# EAGLE board receiver (EAGLE 6.4)
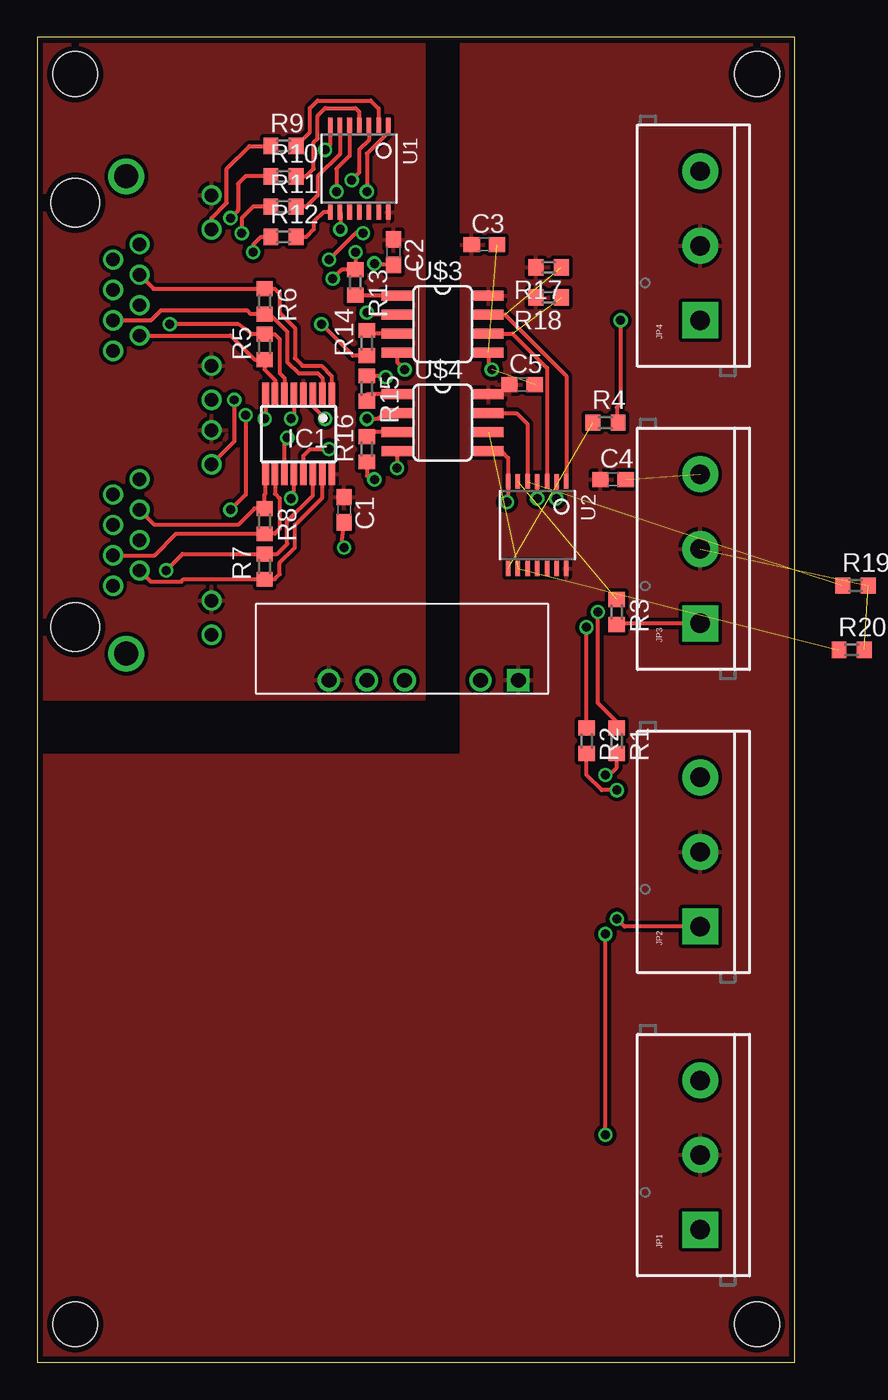
[diagram p0: board, top side]
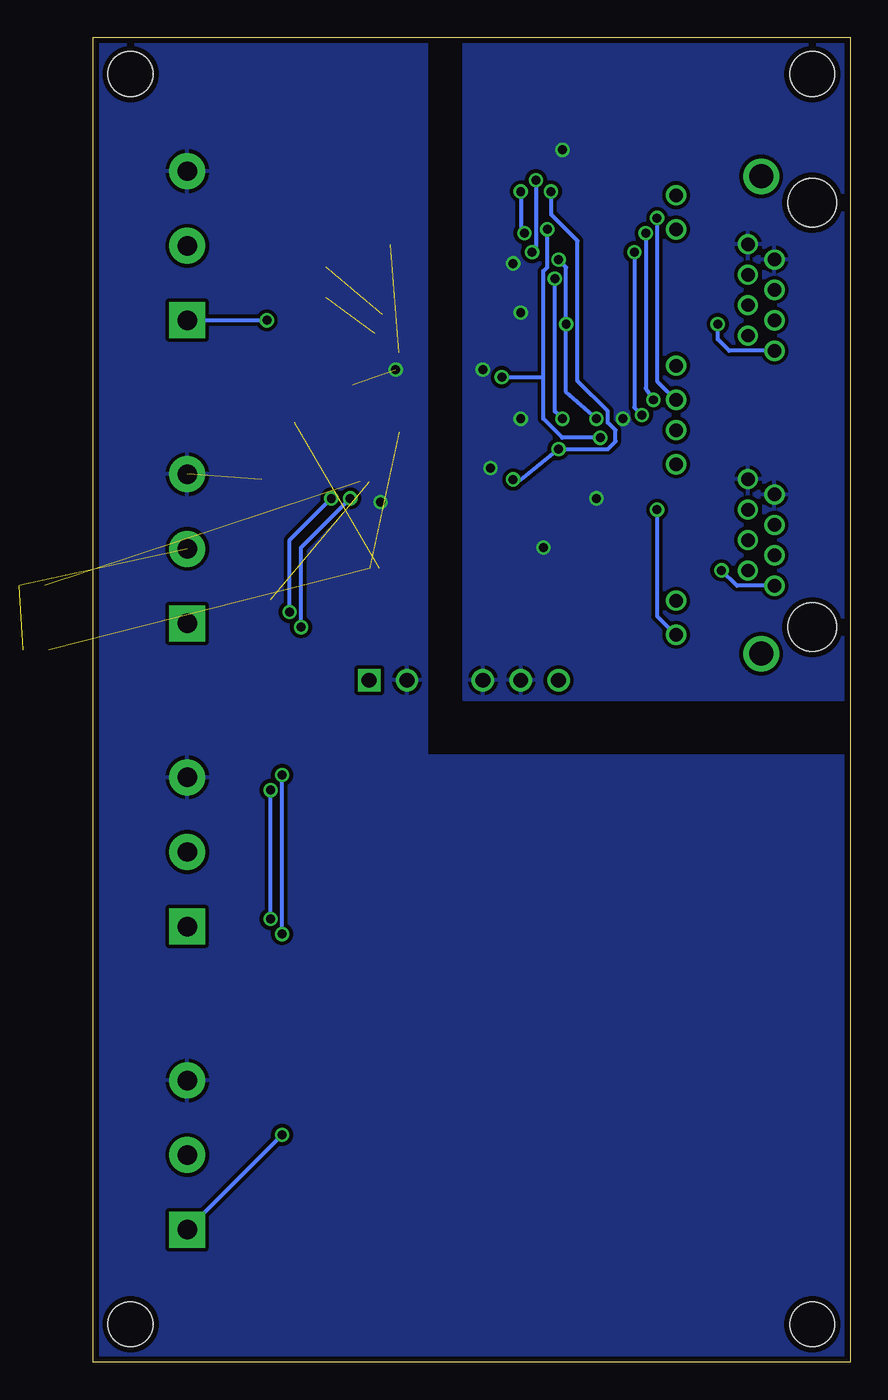
[diagram p1: board, bottom side, seen from below]

Size 50.78 x 88.82 mm. Coordinates in mm from the lower left corner, seen from the top.
Outline: 0,0 50.78,0 50.78,88.82 0,88.82 0,0
Copper layers (1*16): Top 0.0356mm / dielectric 1.5011mm / Bottom 0.0356mm
Design rules "LaenPCBOrder": minimum track width 6mil, minimum drill 13mil, track to track 6mil, track to pad 6mil, pad to pad 6mil, via to via 6mil, smd to smd 6mil, copper to edge 15mil, drill to drill 6mil, minimum pad ring 7mil, minimum via ring 7mil, stop-mask expansion 4mil, vias tented up to drill 0mil, thermal gap 10mil
Holes 3 mm at 2.54,86.36 2.54,2.54 48.26,2.54 48.26,86.36

## Footprints (pad centres in the part's own frame; a part is rotated, then mirrored left to right if it is on the bottom)
C0603 = smd 1.1 x 1: 1 -0.85,0; 2 0.85,0
QSOP16 = smd 0.45 x 1.5: 1 -2.223,-2.69; 2 -1.587,-2.69; 3 -0.953,-2.69; 4 -0.318,-2.69; 5 0.318,-2.69; 6 0.953,-2.69; 7 1.587,-2.69; 8 2.223,-2.69; 9 2.223,2.69; 10 1.587,2.69; 11 0.953,2.69; 12 0.318,2.69; 13 -0.318,2.69; 14 -0.953,2.69; 15 -1.587,2.69; 16 -2.223,2.69
SCREWTERMINAL-5MM-3 = drill 1.3 pad 2.413 square: 1 0,0 | drill 1.3 pad 2.413: 2 5,0; 3 10,0
R0603 = smd 1 x 1.1: 1 -0.85,0; 2 0.85,0
TSSOP14 = smd 0.305 x 0.991: 1 -1.95,-2.918; 2 -1.3,-2.918; 3 -0.65,-2.918; 4 0,-2.918; 5 0.65,-2.918; 6 1.3,-2.918; 7 1.95,-2.918; 8 1.95,2.918; 9 1.3,2.918; 10 0.65,2.918; 11 0,2.918; 12 -0.65,2.918; 13 -1.3,2.918; 14 -1.95,2.918
RJ45_2X1 = drill 0.9: A_1 -4.305,2.54; A_2 -5.325,4.32; A_3 -6.345,2.54; A_4 -7.365,4.32; A_5 -8.385,2.54; A_6 -9.405,4.32; A_7 -10.425,2.54; A_8 -11.445,4.32; A_GREEN_+ -3.305,9.14; A_GREEN_- -1.015,9.14; A_YELLOW_+ -14.735,9.14; A_YELLOW_- -12.445,9.14; B_1 11.445,2.54; B_2 10.425,4.32; B_3 9.405,2.54; B_4 8.385,4.32; B_5 7.365,2.54; B_6 6.345,4.32; B_7 5.325,2.54; B_8 4.305,4.32; B_GREEN_+ 12.445,9.14; B_GREEN_- 14.735,9.14; B_YELLOW_+ 1.015,9.14; B_YELLOW_- 3.305,9.14 | drill 1.6: P$3 -16,3.43; P$6 16,3.43 | hole 3.25: -14.225,0; 14.225,0
IB_XLS-1W = drill 1 square: P$1 0,0 | drill 1: P$2 2.54,0; P$3 7.62,0; P$4 10.16,0; P$5 12.7,0
SO08 = smd 0.66 x 2.032: 1 -1.905,-3.073; 2 -0.635,-3.073; 3 0.635,-3.073; 4 1.905,-3.073; 5 1.905,3.073; 6 0.635,3.073; 7 -0.635,3.073; 8 -1.905,3.073

## Placement (x,y rotation side)
C1  .1uF  [C0603]  20.57,57.15 270 top
C2  .1uF  [C0603]  23.88,74.42 270 top
C3  .1uF  [C0603]  29.97,74.93 0 top
C4  .1uF  [C0603]  38.61,59.18 0 top
C5  .1uF  [C0603]  32.51,65.53 0 top
IC1  MAX3095CEE  [QSOP16]  17.53,62.23 180 top
JP1  [SCREWTERMINAL-5MM-3]  44.45,8.89 90 top
JP2  [SCREWTERMINAL-5MM-3]  44.45,29.21 90 top
JP3  [SCREWTERMINAL-5MM-3]  44.45,49.53 90 top
JP4  [SCREWTERMINAL-5MM-3]  44.45,69.85 90 top
R1  100  [R0603]  38.86,41.66 270 top
R2  100  [R0603]  36.83,41.66 270 top
R3  100  [R0603]  38.86,50.29 270 top
R4  100  [R0603]  38.1,62.99 0 top
R5  180  [R0603]  15.24,68.07 90 top
R6  180  [R0603]  15.24,71.12 270 top
R7  180  [R0603]  15.24,53.34 90 top
R8  180  [R0603]  15.24,56.39 270 top
R9  180  [R0603]  16.51,81.53 0 top
R10  180  [R0603]  16.51,79.5 0 top
R11  180  [R0603]  16.51,77.47 0 top
R12  180  [R0603]  16.51,75.44 0 top
R13  [R0603]  21.34,72.39 270 top
R14  [R0603]  22.1,68.33 90 top
R15  [R0603]  22.1,65.28 270 top
R16  [R0603]  22.1,61.21 90 top
R17  [R0603]  34.29,73.41 180 top
R18  [R0603]  34.29,71.37 180 top
R19  [R0603]  54.86,52.07 0 top  (outside the outline)
R20  [R0603]  54.61,47.75 0 top
U1  74HC04_HEX_INVERTERTSSOP14  [TSSOP14]  21.59,80.01 180 top
U2  74HC04_HEX_INVERTERTSSOP14  [TSSOP14]  33.53,56.13 180 top
U$1  RJ45_2X1  [RJ45_2X1]  2.54,63.5 270 top
U$2  DC_DC_ISOLATED_0505  [IB_XLS-1W]  32.26,45.72 180 top
U$3  HCPL-0631-500E  [SO08]  27.18,69.6 270 top
U$4  HCPL-0631-500E  [SO08]  27.18,62.99 270 top

## Library data of the parts
C1-C5 R1-R20 = adafruit
IC1 = maxim; MPN: MAX3095CEE+; OC_FARNELL: unknown; OC_NEWARK: 67K4748
JP1-JP4 = SparkFun-Connectors
U1 U2 U$1 U$3 U$4 = LEDscape
U$2 = blinkiverse

## Nets
5V: C1.1 C2.1 IC1.4 IC1.16 U1.14 U$1.A_GREEN_+ U$1.A_YELLOW_+ U$1.B_GREEN_+ U$1.B_YELLOW_+ U$2.P$5
5V_IN: C3.1 C4.1 C5.1 JP1.2 JP2.2 JP3.2 JP4.2 R17.2 R18.2 R19.2 R20.2 U2.14 U$2.P$1 U$3.8 U$4.8
GND: C1.2 C2.2 IC1.8 IC1.12 U1.7 U$1.A_7 U$1.A_8 U$1.B_7 U$1.B_8 U$2.P$3 U$2.P$4 U$3.2 U$3.4 U$4.2 U$4.4
GND_IN: C3.2 C4.2 C5.2 JP1.3 JP2.3 JP3.3 JP4.3 U2.7 U$2.P$2 U$3.5 U$4.5
IND0: R9.2 U1.2
IND1: R10.2 U1.4
IND2: R11.2 U1.6
IND3: R12.2 U1.8
N$1: JP1.1 R1.2
N$2: IC1.6 R5.2 U$1.A_1
N$3: IC1.7 R5.1 U$1.A_2
N$4: JP2.1 R2.2
N$5: JP3.1 R3.2
N$6: JP4.1 R4.2
N$7: R9.1 U$1.A_YELLOW_-
N$8: IC1.2 R6.2 U$1.A_3
N$9: IC1.1 R6.1 U$1.A_6
N$10: IC1.14 R7.2 U$1.B_1
N$11: IC1.15 R7.1 U$1.B_2
N$12: IC1.10 R8.2 U$1.B_3
N$13: IC1.9 R8.1 U$1.B_6
N$14: R10.1 U$1.A_GREEN_-
N$15: R11.1 U$1.B_YELLOW_-
N$16: R12.1 U$1.B_GREEN_-
N$17: R13.2 U$3.1
N$18: R14.2 U$3.3
N$19: R15.2 U$4.1
N$20: R16.2 U$4.3
N$21: R18.1 U2.3 U$3.6
N$22: R17.1 U2.1 U$3.7
N$23: R19.1 U2.5 U$4.7
N$24: R20.1 U2.9 U$4.6
N$25: R1.1 U2.2
N$26: R2.1 U2.4
N$27: R3.1 U2.6
N$28: R4.1 U2.8
S0: IC1.5 R14.1 U1.1
S1: IC1.3 R13.1 U1.3
S2: IC1.13 R16.1 U1.5
S3: IC1.11 R15.1 U1.9

## Tracks (layer width: path | path; a pad name or v marks a point on that pad's centre or on a via)
5V
  pour Top (isolate 0.254): 0,44.45 0,88.9 25.91,88.9 25.91,44.45
5V_IN  (2 unrouted)
  pour Top (isolate 0.254): 28.45,88.9 28.45,40.64 0,40.64 0,0 50.8,0 50.8,88.9
GND  (via drill 0.6)
  Top 0.254: U1.7 19.64,81.62 v19.3,81.28 | IC1.8 15.3,63.44 v15.24,63.25 | C2.2 22.69,73.57 v22.61,73.66 | C1.2 20.41,55.12 v20.57,54.61 | v17.02,57.91 17.21,58.48 IC1.12 | 24.13,61.09 v24.13,59.94 | U$3.2 22.1,70.23 v22.1,70.36 | v22.1,63.25 22.86,63.25 23.11,63.5 23.98,63.5 | 24.13,67.69 24.13,67.06 v24.64,66.55
  Top 0.406: U$4.4 24.13,61.09 | U$3.4 24.13,67.69 | 23.98,63.5 U$4.2
  pour Bottom (isolate 0.254): 0,44.45 0,88.9 25.91,88.9 25.91,44.45
GND_IN  (via drill 0.6)  (3 unrouted)
  Top 0.254: U$4.5 31.11,61.09 31.58,60.62 U2.7 31.58,57.74 v31.5,57.66 | U$3.5 30.25,66.78 v30.48,66.55
  pour Bottom (isolate 0.254): 28.45,88.9 28.45,40.64 0,40.64 0,0 50.8,0 50.8,88.9
IND0
  Top 0.254: R9.2 18.29,82.46 18.29,84.07 18.8,84.58 22.35,84.58 22.89,84.04 U1.2
IND1
  Top 0.254: R10.2 18.03,79.5 18.54,80.01 18.54,81.79 18.8,82.04 18.8,83.57 19.3,84.07 21.34,84.07 21.59,83.82 U1.4
IND2
  Top 0.254: U1.6 20.29,81 18.8,79.5 18.8,78.23 18.03,77.47 R11.2
IND3
  Top 0.254: U1.8 19.18,77.09 18.54,76.45 18.54,75.95 18.03,75.44 R12.2
N$1  (via drill 0.6)
  Top 0.254: v38.1,15.24 v38.1,28.7 | v38.1,39.37 38.35,39.37 38.86,39.88 R1.2
  Bottom 0.254: JP1.1 v38.1,15.24 | v38.1,28.7 v38.1,39.37
N$2  (via drill 0.6)
  Top 0.254: IC1.6 16.57,65.98 16.26,66.29 16.26,68.58 15.91,68.92 R5.2 14.39,68.92 13.46,69.6 v8.89,69.6
  Bottom 0.254: U$1.A_1 8.12,67.81 8.89,68.58 v8.89,69.6
N$3
  Top 0.254: IC1.7 15.94,65.85 15.24,66.55 R5.1 14.57,67.22 12.96,68.83 U$1.A_2
N$4  (via drill 0.6)
  Top 0.254: JP2.1 39.37,29.21 v38.86,29.72 | v38.86,38.35 37.85,38.35 36.83,39.37 R2.2
  Bottom 0.254: v38.86,29.72 v38.86,38.35
N$5
  Top 0.254: JP3.1 38.95,49.53 R3.2
N$6  (via drill 0.6)
  Top 0.254: v39.12,69.85 39.12,64.26 38.86,64.01 38.86,63.08 R4.2
  Bottom 0.254: JP4.1 v39.12,69.85
N$7
  Top 0.254: R9.1 14.22,81.53 12.7,80.01 12.7,77.72 11.68,76.7 U$1.A_YELLOW_-
N$8
  Top 0.254: U$1.A_3 7.62,69.85 8.29,70.52 14.06,70.52 14.31,70.27 R6.2 15.58,70.27 16.76,69.09 16.76,67.06 17.53,66.29 18.8,66.29 19.11,65.98 IC1.2
N$9
  Top 0.254: U$1.A_6 7.79,71.97 R6.1 15.91,71.97 16.26,71.63 16.26,70.36 17.27,69.34 17.27,67.31 17.78,66.8 19.05,66.8 19.75,66.1 IC1.1
N$10  (via drill 0.6)
  Top 0.254: v8.64,53.09 9.74,54.19 R7.2 16.09,54.19 16.76,54.86 16.76,56.39 18.48,58.1 IC1.14
  Bottom 0.254: U$1.B_1 7.61,52.05 v8.64,53.09
N$11
  Top 0.254: U$1.B_2 7.61,52.32 9.65,52.32 9.82,52.49 R7.1 15.91,52.49 16.26,52.83 16.26,53.59 17.27,54.61 17.27,56.13 19.11,57.98 IC1.15
N$12
  Top 0.254: U$1.B_3 7.87,54.09 9.31,55.54 R8.2 15.91,55.54 16.26,55.88 16.26,57.91 15.94,58.23 IC1.10
N$13
  Top 0.254: U$1.B_6 7.88,56.13 13.46,56.13 14.57,57.24 R8.1 15.24,58.17 15.3,58.23 IC1.9
N$14  (via drill 0.6)
  Top 0.254: R10.1 13.97,79.5 13.46,78.99 13.46,77.22 v12.95,76.71
  Bottom 0.254: v12.95,76.71 12.95,65.79 U$1.A_GREEN_-
N$15  (via drill 0.6)
  Top 0.254: R11.1 14.48,77.47 13.72,76.71 v13.72,75.69 | v13.21,64.52 13.21,61.72 U$1.B_YELLOW_-
  Bottom 0.254: v13.72,75.69 13.72,65.28 v13.21,64.52
N$16  (via drill 0.6)
  Top 0.254: R12.1 14.99,75.44 14.48,74.93 v14.48,74.42 | v13.97,63.5 13.97,58.17 v12.95,57.15
  Bottom 0.254: v14.48,74.42 14.48,64.01 v13.97,63.5 | v12.95,57.15 12.95,50.04 U$1.B_GREEN_-
N$17
  Top 0.254: U$3.1 21.34,71.5
  Top 0.406: 21.34,71.5 R13.2
N$18
  Top 0.254: U$3.3 22.35,68.96
  Top 0.406: 22.35,68.96 R14.2
N$19
  Top 0.254: U$4.1 22.1,64.9 R15.2
N$20
  Top 0.254: U$4.3 22.1,62.36
  Top 0.406: 22.1,62.36 R16.2
N$21  (1 unrouted)
  Top 0.254: U$3.6 31.88,68.96 34.18,66.66 U2.3
N$22  (1 unrouted)
  Top 0.254: U$3.7 31.37,70.23 35.48,66.12 U2.1
N$23  (1 unrouted)
  Top 0.254: U$4.7 32.13,63.63 32.88,62.88 U2.5
N$24  (2 unrouted)
N$25  (via drill 0.6)
  Top 0.254: R1.1 38.86,42.93 37.59,44.2 v37.59,50.29 | U2.2 34.83,57.94 v34.8,57.91
  Bottom 0.254: v37.59,50.29 37.59,55.12 35.05,57.66 v34.8,57.91
N$26  (via drill 0.6)
  Top 0.254: R2.1 v36.83,49.28 | v33.53,57.91 U2.4
  Bottom 0.254: v36.83,49.28 36.83,54.61 v33.53,57.91
N$27  (1 unrouted)
N$28  (1 unrouted)
S0  (via drill 0.6)
  Top 0.254: U1.1 23.54,82.47 22.1,81.03 v22.1,78.49 | IC1.5 17.21,63.56 v17.02,63.25 | v21.84,75.69 21.34,75.69 v19.56,73.91 | R14.1 21.17,67.48 v19.05,69.6
  Bottom 0.254: v17.02,63.25 19.05,65.02 v19.05,69.6 19.05,73.41 v19.56,73.91 | v22.1,78.49 22.1,75.95 v21.84,75.69
S1  (via drill 0.6)
  Top 0.254: U1.3 22.24,81.93 21.59,81.28 21.59,79.76 v21.08,79.25 | IC1.3 18.48,64.07 v19.3,63.25 | v21.34,74.42 R13.1 20.41,73.24 v19.81,72.64
  Bottom 0.254: v21.08,79.25 21.08,74.68 v21.34,74.42 | v19.3,63.25 19.81,63.75 v19.81,72.64
S2  (via drill 0.6)
  Top 0.254: v20.07,78.49 20.07,80.01 20.94,80.88 U1.5 | IC1.13 17.84,60.77 18.29,61.21 v19.56,61.21 | R16.1 22.1,59.44 v22.61,59.18
  Bottom 0.254: v20.07,78.49 20.07,76.96 18.29,75.18 18.29,65.79 16.26,63.75 16.26,62.99 15.75,62.48 15.75,61.72 16.26,61.21 v19.56,61.21 22.1,59.18 v22.61,59.18
S3  (via drill 0.6)
  Top 0.254: IC1.11 16.57,61.66 v16.76,61.98 | R15.1 23.28,66.13 v23.37,66.04 | U1.9 20.32,77.06 v20.32,75.95
  Bottom 0.254: v16.76,61.98 19.3,61.98 20.57,63.25 20.57,66.04 | 20.57,66.04 20.57,73.15 20.32,73.41 v20.32,75.95 | v23.37,66.04 20.57,66.04